# Allegro board stm32f10x.brd
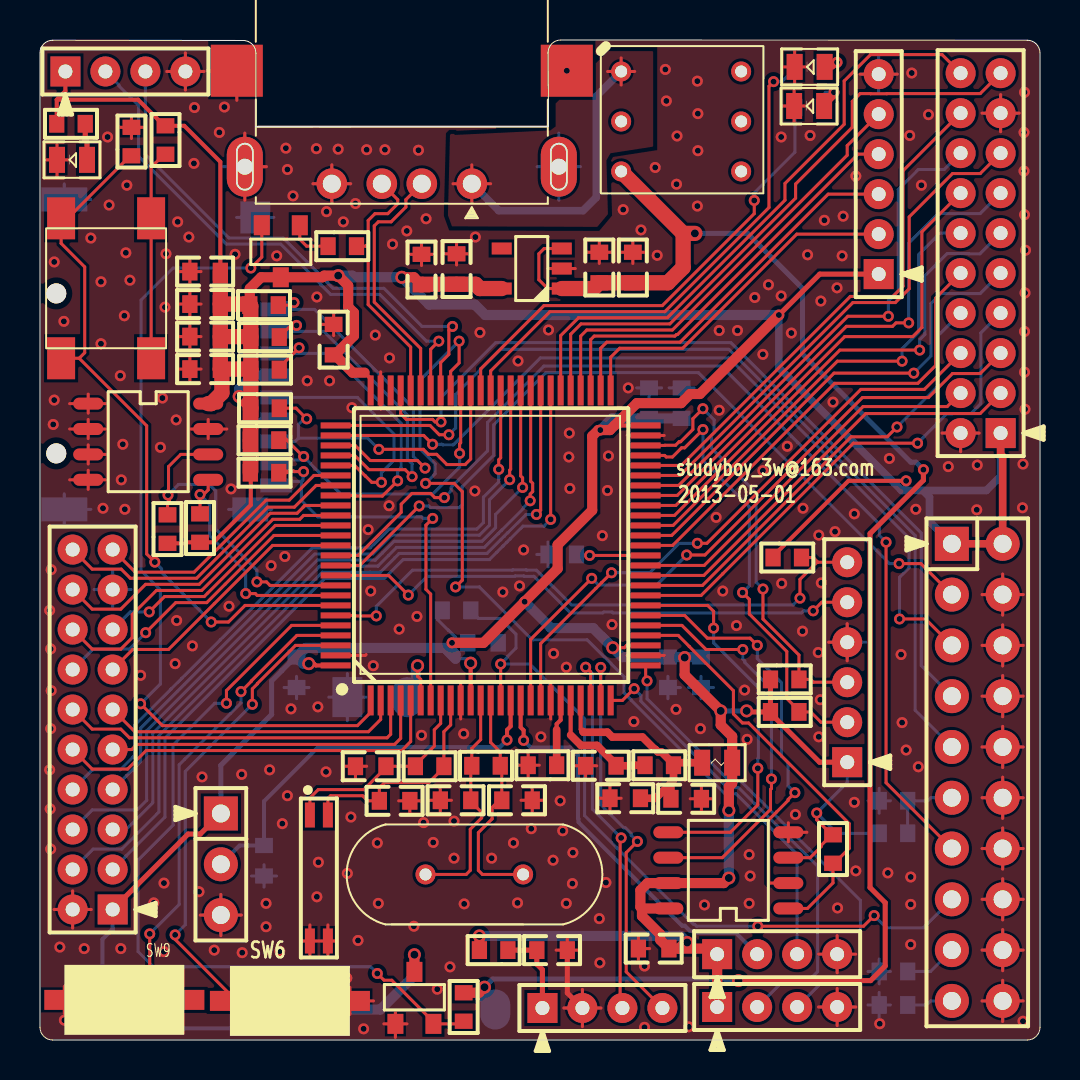
[diagram p0: board, top side]
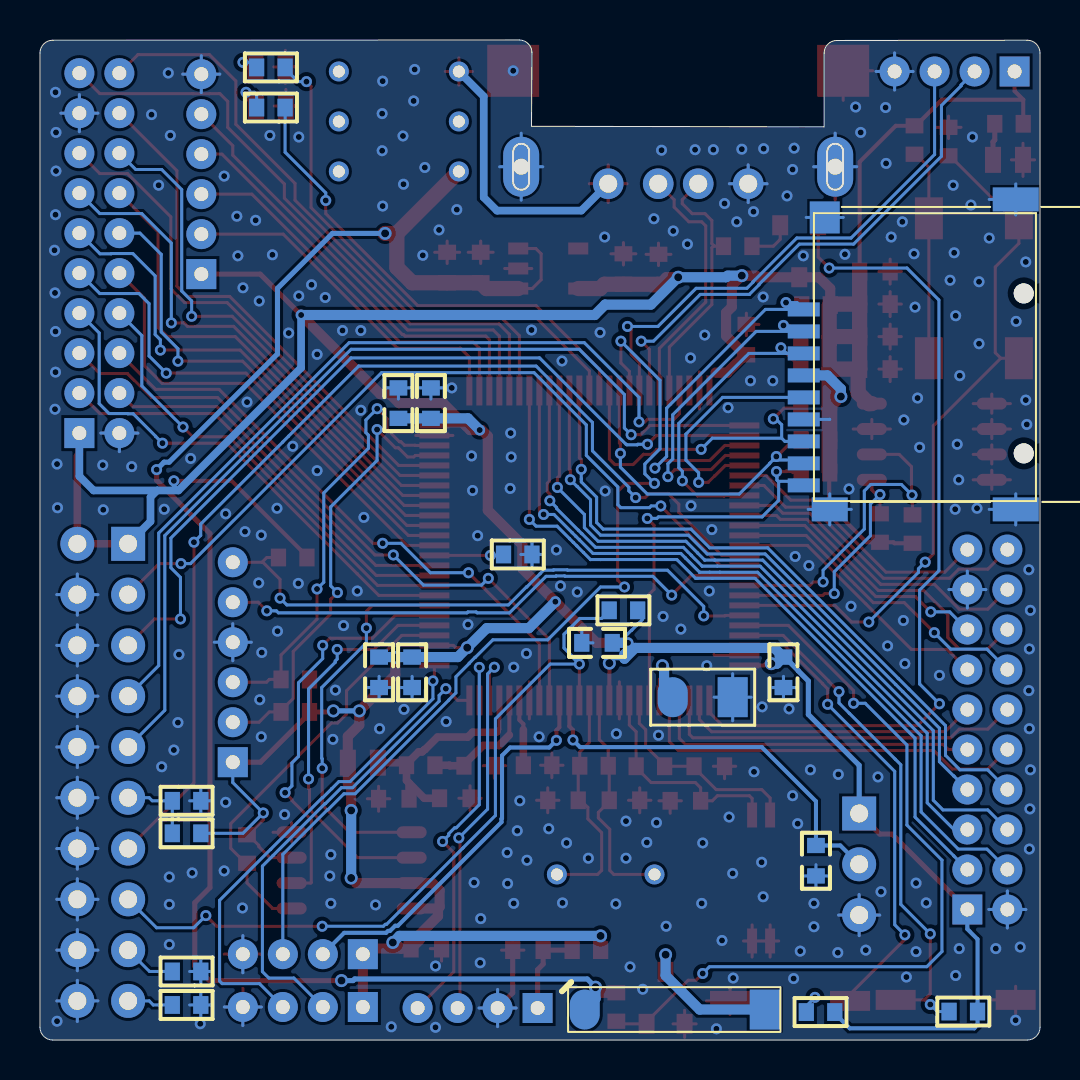
[diagram p1: board, bottom side, seen from below]

Outline 50 x 50.01 mm; copper layers: TOP, BOTTOM. Coordinates in mm from the lower left corner of the outline.
Outline path: 0,49.37 0,0.64 arc(0.19,0.19) 0.64,0 49.37,0 arc(49.81,0.19) 50,0.64 50,49.37 arc(49.81,49.81) 49.37,50 26.04,50.01 arc(25.59,49.83) 25.4,49.37 25.43,45.69 10.79,45.67 10.79,49.35 arc(10.61,49.8) 10.16,49.99 0.64,50 arc(0.19,49.81) 0,49.37

## Placement (name value [footprint] x y rotation side)
BAT2  BATJack/NC  [CON2A]  16.87 17.14 180 bottom
C6  20pF  [C0603]  20.78 11.99 0 top
C8  10uF  [C0603]  29.64 38.63 90 top
C9  20pF  [C0603]  23.85 11.99 180 top
C11  100nF  [C0603]  22.15 19.86 180 bottom
C12  100nF  [C0603]  12.83 18.39 90 bottom
C13  100nF  [C0603]  31.39 18.39 90 bottom
C14  100nF  [C0603]  32.08 31.85 270 bottom
C15  100nF  [C0603]  14.68 35.03 270 top
C16  10uF  [C0603]  32.31 12.06 0 top
C17  10nF  [C0603]  29.26 12.09 0 top
C18  10nF  [C0603]  28.04 13.72 0 top
C19  10uF  [C0603]  20.83 38.56 90 top
C24  100nF  [C0603]  33.05 18.39 90 bottom
C25  100nF  [C0603]  30.45 31.85 270 bottom
C31  1uF  [C0603]  27.97 38.63 90 top
C32  1uF  [C0603]  19.08 38.53 90 top
C48  100nF  [C0603]  8.26 38.43 0 top
C49  100nF  [C0603]  8.26 36.8 0 top
C50  100nF  [C0603]  8.26 35.18 0 top
C65  18pF/1%  [C0603]  16.54 13.69 0 top
C67  18pF/1%  [C0603]  17.73 11.96 180 top
C190  100nF  [C0603]  8.26 33.55 0 top
C191  100nF  [C0603]  30.68 4.57 0 top
C192  100nF  [C0603]  25.6 4.5 180 top
C193  100nF  [C0603]  11.2 8.97 90 bottom
CON105  T_FLASH_A  [TFLASH]  0.81 37.34 270 bottom
D2  RED  [D0805]  1.6 44.02 180 top
D3  RED  [D0805]  38.48 48.67 180 top
D4  RED  [D0805]  38.46 46.71 180 top
DOWN4  -  [USBH]  21.59 42.82 180 top
J9  CON4  [HDR200M-1X4]  1.27 48.44 0 top
J10  CON20A  [HDR254M-2X10]  45.59 24.82 270 top
J12  Power  [SW_2_8X8]  29.06 48.44 90 top
J13  CON20A  [HDR200M-2X10]  48.03 30.35 90 top
J14  CON20A  [HDR200M-2X10]  3.63 6.53 90 top
JP6  CON\1X6P2MM  [HDR200M-1X6]  40.36 13.89 90 top
JP7  CON\1X6P2MM  [HDR200M-1X6]  41.94 38.3 90 top
JP10  CON\1X4P2MM  [HDR200M-1X4]  33.86 1.65 0 top
JP11  CON\1X4P2MM  [HDR200M-1X4]  33.86 4.29 0 top
JP12  CON\1X4P2MM  [HDR200M-1X4]  25.12 1.6 0 top
L2  CBG201209U12  [L0805]  33.86 13.87 180 top
Q3  PNP  [SOT-23]  12.04 39.45 180 top
Q4  PNP  [SOT-23]  18.72 2.11 0 top
R4  10K  [R0603]  26.11 24.28 180 bottom
R5  10K  [R0603]  20.83 21.49 0 bottom
R7  1M/NC  [R0603]  22.3 13.72 0 top
R8  0R  [R0603]  25.12 13.74 180 top
R9  1K  [R0603]  1.55 45.82 0 top
R10  1K  [R0603]  15.11 39.7 0 top
R12  100K  [R0603]  4.57 44.93 90 top
R13  1K  [R0603]  6.27 45.01 270 top
R14  4.7K  [R0603]  37.24 16.41 0 top
R15  4.7K  [R0603]  37.24 18.03 0 top
R16  47R  [R0603]  30.96 13.74 0 top
R17  4.7K  [R0603]  37.36 24.13 0 top
R18  600  [R0603]  38.46 48.64 0 bottom
R19  600  [R0603]  38.46 46.63 0 bottom
R20  33R  [R0603]  22.68 4.5 180 top
R21  4.7K  [R0603]  6.38 25.55 90 top
R22  4.7K  [R0603]  8 25.6 90 top
R23  4.7K  [R0603]  39.65 9.55 270 top
R24  10K  [R0603]  10.97 1.4 0 bottom
R25  10K  [R0603]  3.84 1.42 0 bottom
R26  10K  [R0603]  21.18 1.65 270 top
R27  10K  [HDR254M-1X3]  9.04 11.33 270 top
R28  10K  [R0603]  42.67 11.96 180 bottom
R29  10K  [R0603]  42.67 1.75 0 bottom
R30  10K  [R0603]  42.67 3.43 0 bottom
R31  1K  [R0603]  42.67 10.34 180 bottom
R37  10M  [R0603]  19.48 13.69 0 top
R47  47K  [R0603]  11.25 33.53 0 top
R48  47K  [R0603]  11.23 28.37 0 top
R49  47K  [R0603]  11.25 31.6 0 top
R50  47K  [R0603]  11.23 30 0 top
R51  47K  [R0603]  11.2 36.75 0 top
R52  47K  [R0603]  11.25 35.15 0 top
SW6  Key1  [TACKSW_SS204]  12.5 1.96 180 top
SW8  BOOT  [K6X6_SMD]  0.3 34.59 90 top
SW9  Key2  [TACKSW_SS204]  4.22 2.01 0 top
U1  STM32F103VBH6  [LQFP100_STM32103VBH6]  14.78 30.73 0 top
U5  LDO3V3  [SOT23-5]  24.59 38.58 0 top
U6  W25X20A  [SO-8]  34.42 8.48 90 top
U15  MOT/NC  [SPKER_SMD]  18.26 1.52 180 bottom
U27  AT24C16B  [SO-8]  5.41 29.92 270 top
X3  -  [32768]  13.94 8.1 0 top
Y1  8MHz (With socket)  [49SS]  24.16 8.28 180 top

## Library data of the parts
BAT2 = BATJack_0
C6 C9 C11-C15 C17 C18 C24 C25 = CAP NP
C8 C19 = CP: room: Power
C16 = CAP POL
C31 C32 = CAPACITOR_1
C48-C50 = CAP_Cer_0
C65 C67 = CAPACITOR_0
C190-C193 = CAP_1
CON105 = T_FLASH_A
D2-D4 = LED
DOWN4 = USBA-A_1
J9 = CON4: User Part Number: partnum; Tolerance: RichardLC
J10 J13 J14 = CON20A: User Part Number: partnum; Tolerance: RichardLC
J12 = SW_2
JP6 JP7 = HEADER 5_10: User Part Number: partnum; Tolerance: RichardLC
JP10-JP12 = HEADER 5_3: User Part Number: partnum; Tolerance: RichardLC
L2 = BEAD
Q3 Q4 = NPN_0
R4 R5 R7 R8 R12-R17 R21-R23 R28-R31 R37 R47-R52 = R
R9 R10 = R: room: Power
R18-R20 = R: room: LEDs
R24-R26 = R: room: KEYs
R27 = R_0: User Part Number: partnum; Tolerance: RichardLC; room: KEYs
SW6 SW9 = SW_TACT_SPST/SM
SW8 = SW PUSHBUTTON-SPST-2/SM_1: room: KEYs
U1 = STM32F103VBH6
U5 = RT9293B_0
U6 = EEPROM_2
U15 = MOT
U27 = AT24C16B
X3 = CRYSTAL_XCOL-3_1
Y1 = ZTA

## Footprints (pads in the part's own frame, mm; a bottom-side part is the same pattern mirrored in y, then rotated)
49SS
  round 1 hole 0.6: 1(0,0) 2(4.88,0)
32768
  rect 0.5x1.25 smd: 1(-0.45,3.15) 2(0.45,3.15) 3(-0.45,-3.15) 4(0.45,-3.15)
C0603
  rect 0.762x0.889 smd: 1(-0.762,0) 2(0.762,0)
CON2A
  oval 1.5x2 smd: 1(-1.499,0)
  rect 1.5x2 smd: 2(1.499,0)
D0805
  rect 0.8x1.3 smd: 1(-0.75,0) 2(0.75,0)
HDR200M-1X4
  rect 1.5x1.5 hole 0.7: 1(0,0)
  round 1.5 hole 0.7: 2(2,0) 3(4,0) 4(6,0)
HDR200M-1X6
  rect 1.5x1.5 hole 0.7: 1(0,0)
  round 1.5 hole 0.7: 2(2,0) 3(4,0) 4(6,0) 5(8,0) 6(10,0)
HDR200M-2X10
  rect 1.5x1.5 hole 0.7: 1(0,0)
  round 1.5 hole 0.7: 2(0,2) 3(2,0) 4(2,2) 5(4,0) 6(4,2) 7(6,0) 8(6,2) 9(8,0) 10(8,2) 11(10,0) 12(10,2) 13(12,0) 14(12,2) 15(14,0) 16(14,2) 17(16,0) 18(16,2) 19(18,0) 20(18,2)
HDR254M-1X3
  rect 1.7x1.7 hole 0.9: 1(0,0)
  round 1.7 hole 0.9: 2(2.54,0) 3(5.08,0)
HDR254M-2X10
  rect 1.7x1.7 hole 0.9: 1(0,0)
  round 1.7 hole 0.9: 2(0,2.54) 3(2.54,0) 4(2.54,2.54) 5(5.08,0) 6(5.08,2.54) 7(7.62,0) 8(7.62,2.54) 9(10.16,0) 10(10.16,2.54) 11(12.7,0) 12(12.7,2.54) 13(15.24,0) 14(15.24,2.54) 15(17.78,0) 16(17.78,2.54) 17(20.32,0) 18(20.32,2.54) 19(22.86,0) 20(22.86,2.54)
K6X6_SMD
  rect 2.1x1.4 smd: 1(-0.5,-0.75) 2(6.5,-0.75) 3(-0.5,-5.25) 4(6.5,-5.25)
L0805
  rect 0.8x1.3 smd: 1(-0.75,0) 2(0.75,0)
LQFP100_STM32103VBH6
  rect 0.3x1.5 smd: 1(1.75,-13.75) 2(2.25,-13.75) 3(2.75,-13.75) 4(3.25,-13.75) 5(3.75,-13.75) 6(4.25,-13.75) 7(4.75,-13.75) 8(5.25,-13.75) 9(5.75,-13.75) 10(6.25,-13.75) 11(6.75,-13.75) 12(7.25,-13.75) 13(7.75,-13.75) 14(8.25,-13.75) 15(8.75,-13.75) 16(9.25,-13.75) 17(9.75,-13.75) 18(10.25,-13.75) 19(10.75,-13.75) 20(11.25,-13.75) 21(11.75,-13.75) 22(12.25,-13.75) 23(12.75,-13.75) 24(13.25,-13.75) 25(13.75,-13.75) 51(13.75,1.75) 52(13.25,1.75) 53(12.75,1.75) 54(12.25,1.75) 55(11.75,1.75) 56(11.25,1.75) 57(10.75,1.75) 58(10.25,1.75) 59(9.75,1.75) 60(9.25,1.75) 61(8.75,1.75) 62(8.25,1.75) 63(7.75,1.75) 64(7.25,1.75) 65(6.75,1.75) 66(6.25,1.75) 67(5.75,1.75) 68(5.25,1.75) 69(4.75,1.75) 70(4.25,1.75) 71(3.75,1.75) 72(3.25,1.75) 73(2.75,1.75) 74(2.25,1.75) 75(1.75,1.75)
  rect 1.5x0.3 smd: 26(15.5,-12) 27(15.5,-11.5) 28(15.5,-11) 29(15.5,-10.5) 30(15.5,-10) 31(15.5,-9.5) 32(15.5,-9) 33(15.5,-8.5) 34(15.5,-8) 35(15.5,-7.5) 36(15.5,-7) 37(15.5,-6.5) 38(15.5,-6) 39(15.5,-5.5) 40(15.5,-5) 41(15.5,-4.5) 42(15.5,-4) 43(15.5,-3.5) 44(15.5,-3) 45(15.5,-2.5) 46(15.5,-2) 47(15.5,-1.5) 48(15.5,-1) 49(15.5,-0.5) 50(15.5,0) 76(0,0) 77(0,-0.5) 78(0,-1) 79(0,-1.5) 80(0,-2) 81(0,-2.5) 82(0,-3) 83(0,-3.5) 84(0,-4) 85(0,-4.5) 86(0,-5) 87(0,-5.5) 88(0,-6) 89(0,-6.5) 90(0,-7) 91(0,-7.5) 92(0,-8) 93(0,-8.5) 94(0,-9) 95(0,-9.5) 96(0,-10) 97(0,-10.5) 98(0,-11) 99(0,-11.5) 100(0,-12)
R0603
  rect 0.762x0.889 smd: 1(-0.712,0) 2(0.712,0)
SO-8
  oval 0.599x1.501 smd: 1(-1.905,-3) 2(-0.635,-3) 3(0.635,-3) 4(1.905,-3) 5(1.905,3) 6(0.635,3) 7(-0.635,3) 8(-1.905,3)
SOT23-5
  rect 1.001x0.599 smd: 1(1.501,-1.001) 2(1.501,0) 3(1.501,1.001) 4(-1.501,1.001) 5(-1.501,-1.001)
SOT-23
  rect 0.8x1 smd: 1(-0.95,-1.3) 2(0.95,-1.3) 3(0,1.3)
SPKER_SMD
  oval 1.5x2 smd: 1(-4.5,0)
  rect 1.5x2 smd: 2(4.5,0)
SW_2_8X8
  round 1 hole 0.6: 1(0,0) 2(-2.5,0) 3(-5,0) 4(0,-6) 5(-2.5,-6) 6(-5,-6)
TACKSW_SS204
  rect 2x1 smd: 1(-3,0) 2(3,0)
TFLASH
  round 1 hole 1 unplated: (0,0) (8,0)
  rect 0.7x1.6 smd: 1(0.8,-11) 2(1.9,-11) 3(3,-11) 4(4.1,-11) 5(5.2,-11) 6(6.3,-11) 7(7.4,-11) 8(8.5,-11) 9(9.6,-11)
  rect 1.6x1.5 smd: 10(-3.8,-9.95)
  rect 1.2x2.3 smd: 11(-4.7,-0.4) 13(10.8,-0.4)
  rect 1.2x1.8 smd: 12(10.8,-9.7)
USBH
  round 1.53 hole 0.9: 1(0,0) 2(2.5,0) 3(4.5,0) 4(7,0)
  oval 1.8x3 hole 0.8: 5(11.35,-0.85) 6(-4.35,-0.85)
  rect 2.6x2.6 smd: 7(11.75,-5.65) 8(-4.75,-5.65)

## Nets
+3V3: C11.2 C12.2 C13.2 C14.2 C15.2 C19.1 C24.2 C25.2 C32.1 C48.2 C49.2 C50.2 C190.2 C191.2 CON105.4(VDD) J9.1 J10.1 J10.2 J13.1 J14.1 JP6.1 JP7.1 JP10.1 JP11.1 L2.1 Q3.3(E) R5.1 R9.1 R13.1 R14.1 R15.1 R17.1 R20.2 R21.1 R22.1 R23.1 R24.1 R25.1 R27.1 R31.2 R47.1 R48.1 R49.1 R50.1 R51.1 R52.1 U1.11(VDD_5) U1.28(VDD_4) U1.50(VDD_1) U1.75(VDD_2) U1.100(VDD_3) U5.5(VOUT) U6.3(WP#) U6.7(HOLD#) U6.8(VCC) U27.8(VCC)
+5V: C8.1 C31.1 J12.3 R26.1 U5.1(VIN) U5.3(CE) U15.1(P)
GND: BAT2.2(-) C6.1 C8.2 C9.1 C11.1 C12.1 C13.1 C14.1 C15.1 C16.2 C17.1 C18.1 C19.2 C24.1 C25.1 C31.2 C32.2 C48.1 C49.1 C50.1 C65.1 C67.1 C190.1 C191.1 C192.1 C193.1 CON105.6(GND) CON105.10 CON105.11 CON105.12 CON105.13 D2.2(CATHODE) D3.2(CATHODE) D4.2(CATHODE) DOWN4.4(GND) DOWN4.5(HAND1) DOWN4.6(HAND2) DOWN4.7(HAND3) DOWN4.8(HAND4) J9.4 J10.4 J10.6 J10.8 J10.10 J10.12 J10.14 J10.16 J10.18 J10.20 J13.2 J13.17 J14.2 J14.17 JP6.4 JP7.6 JP10.4 JP11.4 JP12.2 Q4.1(C) R4.2 R8.2 R12.2 R27.3 R28.2 R29.1 R30.1 SW6.1 SW9.1 U1.10(VSS_5) U1.19(VSSA) U1.27(VSS_4) U1.49(VSS_1) U1.74(VSS_2) U1.99(VSS_3) U5.2(GND) U6.4(GND) U27.1(A0) U27.2(A1) U27.3(A2) U27.4(NGND) U27.7(WP) X3.3(SHIELD) X3.4
VBAT: BAT2.1(+) U1.6(VBAT)
VDDA: C16.1 C17.2 L2.2 R16.2 U1.22(VDDA)
ADC0: C193.2 R27.2 U1.15(PC0/ADC_INI0)
ADC1: JP11.2 U1.16(PC1/ADC_INI1)
ADC1_EN: JP11.3 U1.67(PA8/USART1_CK/TIM1_CH1/MCO)
BOOT0: R12.1 SW8.1 SW8.2 U1.94(BOOT0)
CLK32K-IN: C65.2 R37.1 U1.8(PC14-OSC32_IN) X3.1
CLK32K-OUT: C67.2 R37.2 U1.9(PC15-OSC32_OUT) X3.2
DBGACK: J10.19 R29.2
DBGRQ: J10.17 R30.2
I2C1_INT: JP6.6 R17.2 U1.95(PB8/TIM4_CH3)
I2C1_SCL: R21.2 U1.92(PB6/I2C1_SCL/TIM4_CH1) U27.6(SCL)
I2C1_SDA: R22.2 U1.93(PB7/I2C1_SDA/TIM4_CH2) U27.5(SDA)
I2C1_SMBAL: JP6.5 U1.91(PB5/I2C1_SMBAL)
I2C2_SCL: JP6.2 R14.2 U1.47(PB10/I2C2_SCL/USART3_TX)
I2C2_SDA: JP6.3 R15.2 U1.48(PB11/I2C2_SDA /USART3_RX)
IRDA_RX: JP12.3 U1.23(PA0-WKUP/USART2_CTS/A DC_IN0/TI)
IRDA_TX: JP12.4 U1.24(PA1/USART2_RTS/ADC_IN1/TIM2_CH2)
KEY1: R24.2 SW6.2 U1.98(PE1)
KEY2: R25.2 SW9.2 U1.97(PE0/TIM4_ETR)
LED1: R18.1 U1.63(PC6)
LED2: R19.1 U1.64(PC7)
MOT: Q4.2(B) R26.2 U1.96(PB9/TIM4_CH4)
OSC_IN: C6.2 R7.1 U1.12(OSC_IN) Y1.2
OSC_OUT: C9.2 R7.2 U1.13(OSC_OUT) Y1.1
PB0: J13.3 U1.35(PB0/ADC_IN8/TIM3_CH3)
PB1: J13.4 U1.36(PB1/ADC_IN9/TIM3_CH4)
PB2: R4.1 U1.37(PB2/BOOT1)
PC2: J13.5 U1.17(PC2/ADC_INI2)
PC3: J13.6 U1.18(PC3/ADC_INI3)
PC4: J13.7 U1.33(PC4/ADC_INI4)
PC5: J13.8 U1.34(PC5/ADC_INI5)
PD0: J14.19 U1.81(PD0)
PD1: J14.20 U1.82(PD1)
PD3: J14.18 U1.84(PD3)
PD4: J14.16 U1.85(PD4)
PD5: J14.15 U1.86(PD5)
PD6: J14.14 U1.87(PD6)
PD7: J14.13 U1.88(PD7)
PD8: J13.19 U1.55(PD8)
PD9: J13.20 U1.56(PD9)
PD10: J14.3 U1.57(PD10)
PD11: J14.4 U1.58(PD11)
PD12: J14.5 U1.59(PD12)
PD13: J14.6 U1.60(PD13)
PD14: J14.7 U1.61(PD14)
PD15: J14.8 U1.62(PD15)
PE3: J14.11 U1.2(PE3)
PE4: J14.12 U1.3(PE4)
PE5: J14.9 U1.4(PE5)
PE6: J14.10 U1.5(PE6)
PE7: J13.10 U1.38(PE7)
PE8: J13.9 U1.39(PE8)
PE9: J13.12 U1.40(PE9)
PE10: J13.11 U1.41(PE10)
PE11: J13.14 U1.42(PE11)
PE12: J13.13 U1.43(PE12)
PE13: J13.16 U1.44(PE13)
PE14: J13.15 U1.45(PE14)
PE15: J13.18 U1.46(PE15)
RESET#: J10.15 R5.2 U1.14(NRST)
RTCK: J10.11 R28.1 R31.1
SPI1_MISO: U1.31(PA6/SPI1_MISO/ADC_IN6/TIM3_CH1) U6.2(SO)
SPI1_MOSI: U1.32(PA7/SPI1_MOSI/ADC_IN7/TIM3_CH2) U6.5(SI)
SPI1_NSS: R23.2 U1.29(PA4/SPI1_NSS/U SART2_CK/ADC_IN4) U6.1(CS#)
SPI1_SCK: U1.30(PA5/SPI1_SCK/ADC_IN5) U6.6(SCK)
SPI2_MISO: JP7.4 U1.53(PB14/SPI2_MISO/USART3_RTS/TIM1_)
SPI2_MOSI: JP7.5 U1.54(PB15/SPI2_MOSITIM1_CH3N)
SPI2_NSS: JP7.2 U1.51(PB12/SPI2_NSS /I2C2_SMBAL/USART)
SPI2_SCK: JP7.3 U1.52(PB13/SPI2_SCK/USART3_CTS/TIM1_C)
TCK/SWCLK: J10.9 U1.76(PA14/JTCK-SWCLK)
TDI: J10.5 U1.77(PA15/JTDI)
TDO/SWO: J10.13 U1.89(PB3/JTDO)
TF0_CD: CON105.9(DET) R48.2 U1.7(PC13-ANTI_TAMP)
TF0_CLK: CON105.5(CLK) U1.80(PC12)
TF0_CMD: CON105.3(CMD) R47.2 U1.83(PD2/TIM3_ETR)
TF0_D0: CON105.7(D0) R49.2 U1.65(PC8)
TF0_D1: CON105.8(D1) R50.2 U1.66(PC9)
TF0_D2: CON105.1(D2) R51.2 U1.78(PC10)
TF0_D3: CON105.2(D3) R52.2 U1.79(PC11)
TMS/SWDIO: J10.7 U1.72(PA13/JTMS-SWDAT)
TRST: J10.3 U1.90(PB4/JTRST)
USART0_RX: J9.2 U1.69(PA10/USART1_RX/T IM1_CH3)
USART0_TX: J9.3 U1.68(PA9/USART1_TX/T IM1_CH2)
USART2_RX: JP10.3 U1.26(PA3/USART2_RX/ADC_IN3/TIM2_CH4)
USART2_TX: JP10.2 U1.25(PA2/USART2_TX/ADC_IN2/TIM2_CH3)
USB_DM: DOWN4.2(D-) U1.70(PA11/USART1_CTS/CANRX/USBDM(2)/)
USB_DP: DOWN4.3(D+) R10.2 U1.71(PA12/USART1_RTS/CANTX/USBDP(2)/)
USB_M: Q3.2(B) U1.1(PE2)
USBVBUS: DOWN4.1(VCC) J12.1
VREF: C18.2 R16.1 U1.21(VREF+)
VREF-: R8.1 U1.20(VREF-)
N287128: D2.1(ANODE) R9.2
N15834662: Q3.1(C) R10.1
N15844638: D3.1(ANODE) R18.2
N15844642: D4.1(ANODE) R19.2
N15845249: Q4.3(E) U15.2(N)
N15864601: C192.2 JP12.1 R20.1
N15869244: R13.2 SW8.3 SW8.4

Pads without a net: J12 2 4 5 6; U1 73; U5 4

## Via types
v1: diameter 0.55, hole 0.3, TOP to BOTTOM, 338 vias
v2: diameter 0.65, hole 0.4, TOP to BOTTOM, 18 vias

## Routing (per net, layer and track width the routed paths; a pad name or vN(x,y) marks a point on that pad's centre or on a via; arc(x,y) is an arc through that point)
+3V3: length 290
  TOP w0.152: U6.3 38.51,9.12 39.06,9.67 39.06,9.74 39.59,10.26 ; v2(28.64,19.62) 29.22,19.62 29.33,19.73 U1.28 ; v1(38.84,11.35) 38.84,11.01 39.59,10.26 ; 39.59,10.26 R23.1
  TOP w0.203: v2(13.44,18.82) 13.7,18.82 13.79,18.73 U1.100 ; U1.11 v2(21.53,18.85) ; 0.84,47.03 1.27,47.46 J9.1 ; 0.84,47.03 R9.1 ; 0.84,47.03 4.9,47.03 6.21,45.72 R13.1 7.21,45.72 9.02,43.92 9.02,38.43 ; R21.1 7.28,24.84 7.33,24.89 R22.1 8.67,24.89 10.54,26.76 10.54,28.45 ; R17.1 36.65,24.19 40.42,27.97 v1(43.31,27.97) ; U1.75 16.53,33.07 16.23,33.38 ; 28.73,30.73 U1.50
  TOP w0.254: R27.1 8.01,10.3 7.4,10.3 J14.1 ; JP7.1 38.99,38.3 v1(36.94,36.26) ; R14.1 36.52,16.34 38.98,13.89 JP6.1 ; R14.1 R15.1 ; R14.1 35.38,16.41 v2(35.33,16.46)
  TOP w0.381: J10.1 J10.2 48.13,29.18 48.03,29.29 J13.1
  TOP w0.508: v2(34.44,11.48) 34.44,12.67 34.61,12.84 L2.1 34.61,15.18 34.04,15.75 v2(34.04,16.46) 32.23,18.26 v2(32.23,19.13) ; v1(20.6,19.86) 22.17,19.86 v1(24.23,21.92) 25.88,23.57 25.88,24.77 27.61,26.49 27.61,30.2 27.91,30.51 v1(28.02,30.51) 28.5,30.51 29.84,31.85 32.05,31.85 32.51,32.31 32.99,32.31 v1(36.94,36.26) ; 31.95,4.57 33.58,4.57 JP11.1 JP10.1 ; 31.95,4.57 32.26,4.88 v2(32.36,4.88) ; 31.95,4.57 C191.2 31.01,5 31.01,5.28 30.1,6.2 30.1,6.58 ; 10.57,30.07 10.57,31.57 v2(9.96,32.18) R49.1 ; R20.2 v2(21.97,5.21) ; 16.23,33.38 15.63,33.38 14.74,34.26 ; R51.1 10.49,37.58 11.06,38.15 Q3.3 14.12,38.15 14.2,38.23 v2(14.91,38.23) 15.41,37.73 15.41,36.66 15.7,36.37 15.7,35.22 14.74,34.26 ; U6.8 30.1,6.58 ; 30.1,6.58 30.02,6.66 30.02,7.49 30.38,7.85 U6.7 34.19,7.85 v2(34.44,8.1) ; 14.74,34.26 C15.2 ; v2(18.09,38.15) 18.7,38.15 C32.1
  TOP w0.762: 9.02,36.8 9.02,35.18 ; 9.02,36.8 10.44,36.8 R51.1 10.54,36.7 R52.1 ; 9.02,36.8 9.02,38.43 ; 9.02,35.18 10.51,35.18 R52.1 ; 9.02,35.18 9.02,33.55 ; R49.1 10.54,28.45 ; R49.1 R47.1 ; R49.1 10.51,31.57 R50.1 R48.1 ; U5.5 21.99,37.58 21.78,37.8 C19.1 19.1,37.8 C32.1 ; 9.02,33.55 10.51,33.55 R47.1 ; 9.02,33.55 9.09,33.48 9.09,32.36 8.56,31.83 U27.8 ; R52.1 R47.1
  BOTTOM w0.152: R5.1 20.12,21.31 19.89,21.08 19.89,21.02 20.41,20.49 20.43,20.49 20.78,20.14 20.78,19.29 ; 20.78,19.07 21.31,19.07 v2(21.53,18.85) ; R31.2 39.85,10.34 v1(38.84,11.35) 40.36,12.88 JP6.1
  BOTTOM w0.203: J14.1 3.63,5.55 3.12,5.04 R25.1 3.12,0.75 3.29,0.58 9.51,0.58 10.26,1.33 R24.1 ; v1(43.31,27.97) 43.31,27.71 43.08,27.48
  BOTTOM w0.254: R27.1 9.04,13.74 11.58,16.28 11.58,17.96 12.09,18.47 12.09,18.48 12.76,19.15 C12.2 ; v2(34.04,16.46) v2(35.33,16.46)
  BOTTOM w0.381: 44.15,27.48 47.32,27.48 48.03,28.19 J13.1 ; 44.15,27.48 43.08,27.48 36.94,33.62 v1(36.94,36.26) ; 44.15,27.48 44.48,27.15 44.48,25.93 J10.1 ; C24.2 33.02,19.13 v2(32.23,19.13)
  BOTTOM w0.508: C24.2 C13.2 29.11,19.15 v2(28.64,19.62) 27.66,20.6 25.55,20.6 v1(24.23,21.92) ; v2(9.96,32.18) 9.96,32.56 10.63,33.24 CON105.4 ; v2(32.36,4.88) 32.03,5.21 v2(21.97,5.21) ; C14.2 C25.2 28.6,31.09 v1(28.02,30.51) ; v2(34.44,8.1) v2(34.44,11.48) ; C11.2 v1(20.6,19.86) 20.6,19.46 20.78,19.29 20.78,19.07 20.24,19.61 13.28,19.61 C12.2 13.16,18.82 v2(13.44,18.82) ; v2(14.91,38.23) 15.62,38.23 15.7,38.15 v2(18.09,38.15) 19.46,36.78 21.74,36.78 22.26,36.26 v1(36.94,36.26)
+5V: length 84.6
  TOP w0.152: U5.3 25.21,39.58 24.94,39.32 24.94,38.02 25.38,37.58 U5.1
  TOP w0.254: v1(44.17,28.52) 44.17,28 41.5,25.33 41.5,7.62 42.26,6.86 42.26,3.7 41.53,2.97 v2(34.92,2.97)
  TOP w0.508: R26.1 21.95,2.36 v2(22.23,2.64)
  TOP w0.762: 32.16,40.34 32.16,38.63 31.39,37.87 C8.1 C31.1 27.68,37.58 U5.1 ; 32.16,40.34 v2(32.74,40.34) ; 32.16,40.34 J12.3
  BOTTOM w0.254: v2(22.23,2.64) 22.63,3.05 34.27,3.05 34.35,2.97 v2(34.92,2.97) ; v2(32.74,40.34) 35.38,40.34 38.13,37.59 38.13,34.32 43.54,28.9 43.8,28.9 v1(44.17,28.52)
  BOTTOM w0.508: U15.1 22.23,2.06 v2(22.23,2.64)
GND: length 305.6
  TOP w0.152: C31.2 28.59,39.4 ; C31.2 27.97,38.84 ; C31.2 27.97,39.95 ; C31.2 27.34,39.4 ; 7.27,47.51 J9.4 ; J9.4 8.2,48.44 ; J9.4 7.27,49.37 ; J9.4 6.34,48.44 ; 8.01,6.25 R27.3 ; R27.3 9.04,7.28 ; R27.3 10.07,6.25 ; R27.3 9.04,5.22 ; J10.12 48.13,13.14 ; J10.12 48.13,11.09 ; J10.12 49.16,12.12 ; J10.12 47.11,12.12 ; C191.1 30.48,4.57 ; C191.1 29.92,5.19 ; C191.1 29.92,3.95 ; 29.35,30.23 U1.49 31.21,30.23 ; J13.2 46.96,30.35 ; J13.2 45.1,30.35 ; J13.2 46.03,29.43 ; 20.02,11.37 C6.1 ; C6.1 20.57,11.99 ; C6.1 19.46,11.99 ; C6.1 20.02,12.61 ; C192.1 26.37,5.12 ; C192.1 25.81,4.5 ; C192.1 26.92,4.5 ; SW9.1 1.22,2.68 ; SW9.1 2.39,2.01 ; SW9.1 1.22,1.33 ; 27.28,13.09 C18.1 ; C18.1 26.72,13.72 ; C18.1 27.84,13.72 ; 14.39,4.15 X3.4 ; X3.4 13.97,4.95 ; X3.4 14.82,4.95 ; X3.4 14.39,5.76 ; J10.14 48.13,10.6 ; J10.14 47.11,9.58 ; J10.14 48.13,8.55 ; J10.14 49.16,9.58 ; 13.07,4.95 X3.3 ; X3.3 13.92,4.95 ; X3.3 13.49,5.76 ; X3.3 13.49,4.15 ; 24.41,13.12 R8.2 ; R8.2 23.85,13.74 ; R8.2 24.41,14.36 ; R8.2 24.97,13.74 ; C48.1 8.05,38.43 ; C48.1 6.93,38.43 ; C48.1 7.49,39.05 ; C48.1 7.49,37.81 ; 37.71,45.88 D4.2 ; D4.2 37.13,46.71 ; D4.2 37.71,47.54 ; D4.2 38.28,46.71 ; 1.48,31.83 U27.1 ; U27.1 3.34,31.83 ; U27.1 2.41,32.3 ; U27.1 2.41,31.35 ; 6.93,33.55 C190.1 ; C190.1 7.49,32.93 ; C190.1 7.49,34.18 ; C190.1 8.05,33.55 ; SW6.1 16.67,1.96 ; SW6.1 15.5,2.63 ; SW6.1 14.32,1.96 ; SW6.1 15.5,1.28 ; U1.99 16.26,19.23 16.31,19.28 ; JP11.4 40.79,4.29 ; JP11.4 39.86,3.36 ; JP11.4 38.93,4.29 ; JP11.4 39.86,5.22 ; 47.11,4.5 J10.18 ; J10.18 48.13,3.47 ; J10.18 49.16,4.5 ; J10.18 48.13,5.52 ; JP12.2 28.05,1.6 ; JP12.2 26.19,1.6 ; JP12.2 27.12,0.67 ; JP12.2 27.12,2.53 ; 37.42,9.91 U6.4 ; U6.4 37.42,10.87 ; U6.4 38.35,10.39 ; 9.84,47 DOWN4.7 8.36,48.47 ; 39.86,0.72 JP10.4 ; JP10.4 39.86,2.58 ; JP10.4 38.93,1.65 ; JP10.4 40.79,1.65 ; 15.21,13.69 C65.1 ; C65.1 15.77,13.07 ; C65.1 16.33,13.69 ; 18.49,11.34 C67.1 ; C67.1 19.05,11.96 ; C67.1 17.93,11.96 ; R12.2 5.19,45.64 ; R12.2 3.95,45.64 ; R12.2 4.57,45.09 ; R12.2 4.57,46.2 ; J10.20 48.13,2.98 ; J10.20 47.11,1.96 ; J10.20 48.13,0.93 ; J10.20 49.16,1.96 ; J10.4 48.13,23.3 ; J10.4 49.16,22.28 ; J10.4 48.13,21.25 ; J10.4 47.11,22.28 ; 0.7,6.53 J14.2 ; J14.2 1.63,7.46 ; J14.2 2.56,6.53 ; J14.2 1.63,5.6 ; C17.1 28.5,12.71 ; C17.1 28.5,11.47 ; C17.1 29.06,12.09 ; C17.1 27.94,12.09 ; 17.03,33.41 U1.74 17.03,31.56 ; 17.77,0.13 Q4.1 ; Q4.1 18.35,0.81 ; Q4.1 17.77,1.49 ; Q4.1 17.19,0.81 ; D2.2 1.43,44.02 ; D2.2 0.85,44.85 ; D2.2 0.27,44.02 ; D2.2 0.85,43.19 ; 21.03,16.06 U1.10 21.03,17.91 ; 48.13,6.01 J10.16 ; J10.16 49.16,7.04 ; J10.16 47.11,7.04 ; J10.16 48.13,8.06 ; C50.1 7.49,35.8 ; C50.1 7.49,34.56 ; C50.1 6.93,35.18 ; C50.1 8.05,35.18 ; 6.93,36.8 C49.1 ; C49.1 8.05,36.8 ; C49.1 7.49,37.43 ; C49.1 7.49,36.18 ; U27.4 3.34,28.02 ; U27.4 2.41,27.54 ; U27.4 1.48,28.02 ; U27.4 2.41,28.49 ; C8.2 30.26,39.4 ; C8.2 29.64,38.84 ; C8.2 29.64,39.95 ; C8.2 29.02,39.4 ; 41.01,48.3 JP7.6 42.86,48.3 ; 24.05,11.99 C9.1 ; C9.1 25.17,11.99 ; C9.1 24.61,11.37 ; C9.1 24.61,12.61 ; 1.48,30.56 U27.2 ; U27.2 2.41,31.03 ; U27.2 3.34,30.56 ; U27.2 2.41,30.08 ; J10.6 48.13,20.76 ; J10.6 49.16,19.74 ; J10.6 47.11,19.74 ; J10.6 48.13,18.71 ; 47.1,46.35 J13.17 ; J13.17 48.96,46.35 ; J13.17 48.03,45.43 ; J13.17 48.03,47.28 ; 40.36,18.97 JP6.4 ; JP6.4 40.36,20.82 ; JP6.4 39.43,19.89 ; J10.8 49.16,17.2 ; J10.8 48.13,16.17 ; J10.8 48.13,18.22 ; J10.8 47.11,17.2 ; J10.10 49.16,14.66 ; J10.10 48.13,15.68 ; J10.10 47.11,14.66 ; J10.10 48.13,13.63 ; C16.2 33.63,12.06 ; C16.2 33.07,12.69 ; C16.2 33.07,11.44 ; C16.2 32.51,12.06 ; 29.35,19.23 U1.27 31.21,19.23 ; 8.41,30.08 U27.7 ; U27.7 8.41,31.03 ; U27.7 7.48,30.56 ; U27.7 9.34,30.56 ; D3.2 38.31,48.67 ; D3.2 37.15,48.67 ; D3.2 37.73,49.49 ; D3.2 37.73,47.84 ; C15.1 14.68,36.35 ; C15.1 14.68,35.23 ; C15.1 14.06,35.79 ; 26.77,38.58 U5.2 25.41,38.58 ; DOWN4.4 14.59,43.77 ; DOWN4.4 15.53,42.82 ; DOWN4.4 14.59,41.88 ; DOWN4.4 13.65,42.82 ; 18.45,39.29 C32.2 ; C32.2 19.08,38.73 ; C32.2 19.08,39.85 ; C32.2 19.7,39.29 ; 20.21,39.32 C19.2 ; C19.2 20.83,38.76 ; C19.2 21.45,39.32 ; C19.2 20.83,39.88 ; DOWN4.5 10.24,45.35 ; DOWN4.5 10.24,42 ; DOWN4.5 11.32,43.67 ; U27.3 3.34,29.29 ; U27.3 2.41,29.76 ; U27.3 2.41,28.81 ; 25.53,17.91 U1.19 25.53,16.06
  TOP w0.254: JP12.2 26.37,2.36 C192.1
  BOTTOM w0.152: J10.20 49.16,1.96 ; J10.20 48.13,0.93 ; J10.20 47.11,1.96 ; J10.20 48.13,2.98 ; R4.2 25.4,24.9 ; R4.2 25.96,24.28 ; R4.2 24.84,24.28 ; R4.2 25.4,23.66 ; 41.96,11.34 R28.2 ; R28.2 42.52,11.96 ; R28.2 41.4,11.96 ; R28.2 41.96,12.59 ; R27.3 9.04,7.28 ; R27.3 9.04,5.22 ; R27.3 10.07,6.25 ; R27.3 8.01,6.25 ; 39.86,5.22 JP11.4 39.86,3.36 ; C25.1 31.08,32.61 ; C25.1 30.45,32.05 ; C25.1 29.83,32.61 ; 32.08,32.05 C14.1 ; C14.1 32.7,32.61 ; C14.1 31.46,32.61 ; DOWN4.4 15.53,42.82 ; DOWN4.4 14.59,43.77 ; DOWN4.4 13.65,42.82 ; DOWN4.4 14.59,41.88 ; 47.11,9.58 J10.14 ; J10.14 48.13,10.6 ; J10.14 49.16,9.58 ; J10.14 48.13,8.55 ; 41.96,1.13 R29.1 ; R29.1 42.52,1.75 ; R29.1 41.4,1.75 ; R29.1 41.96,2.37 ; 41.94,47.38 JP7.6 ; JP7.6 41.94,49.23 ; JP7.6 41.01,48.3 ; JP7.6 42.86,48.3 ; 48.13,21.25 J10.4 ; J10.4 47.11,22.28 ; J10.4 48.13,23.3 ; J10.4 49.16,22.28 ; 48.13,13.63 J10.10 ; J10.10 48.13,15.68 ; J10.10 49.16,14.66 ; J10.10 47.11,14.66 ; 15.37,15.97 BAT2.2 ; BAT2.2 15.37,18.32 ; BAT2.2 14.44,17.14 ; BAT2.2 16.29,17.14 ; 47.11,12.12 J10.12 ; J10.12 49.16,12.12 ; J10.12 48.13,13.14 ; J10.12 48.13,11.09 ; 7.27,47.51 J9.4 ; J9.4 7.27,49.37 ; J9.4 6.34,48.44 ; J9.4 8.2,48.44 ; 25.94,42 DOWN4.6 ; DOWN4.6 24.86,43.67 ; DOWN4.6 27.02,43.67 ; DOWN4.6 25.94,45.35 ; 47.1,46.35 J13.17 ; J13.17 48.03,47.28 ; J13.17 48.96,46.35 ; J13.17 48.03,45.43 ; 22.35,19.86 C11.1 22.91,20.49 ; 47.11,7.04 J10.16 ; J10.16 48.13,8.06 ; J10.16 48.13,6.01 ; J10.16 49.16,7.04 ; R30.1 42.52,3.43 ; R30.1 41.96,2.81 ; R30.1 41.96,4.05 ; R30.1 41.4,3.43 ; CON105.11 2.54,42.04 ; CON105.11 1.21,41.26 ; CON105.11 1.21,42.82 ; CON105.6 10.52,31.04 ; 46.03,29.43 J13.2 ; J13.2 46.96,30.35 ; J13.2 45.1,30.35 ; 26.19,1.6 JP12.2 ; JP12.2 27.12,0.67 ; JP12.2 27.12,2.53 ; JP12.2 28.05,1.6 ; DOWN4.5 10.24,45.35 ; DOWN4.5 11.32,43.67 ; DOWN4.5 9.16,43.67 ; 47.11,19.74 J10.6 ; J10.6 49.16,19.74 ; J10.6 48.13,20.76 ; J10.6 48.13,18.71 ; 10.58,8.2 C193.1 ; C193.1 11.2,7.65 ; C193.1 11.2,8.76 ; C193.1 11.82,8.2 ; CON105.12 10.51,27.32 ; CON105.12 11.59,26.54 ; CON105.12 10.51,25.76 ; CON105.12 9.43,26.54 ; JP6.4 40.36,20.82 ; JP6.4 41.29,19.89 ; JP6.4 39.43,19.89 ; JP6.4 40.36,18.97 ; J14.2 1.63,7.46 ; J14.2 2.56,6.53 ; J14.2 0.7,6.53 ; J14.2 1.63,5.6 ; 3.63,21.6 J14.17 ; J14.17 3.63,23.46 ; J14.17 2.7,22.53 ; J14.17 4.56,22.53 ; 47.11,17.2 J10.8 ; J10.8 49.16,17.2 ; J10.8 48.13,18.22 ; J10.8 48.13,16.17 ; 48.13,3.47 J10.18 ; J10.18 48.13,5.52 ; J10.18 49.16,4.5 ; J10.18 47.11,4.5 ; 31.39,17.07 C13.1 ; C13.1 32.02,17.63 ; C13.1 31.39,18.19 ; C24.1 33.67,17.63 ; C24.1 32.42,17.63 ; C24.1 33.05,18.19 ; C24.1 33.05,17.07 ; 12.2,17.63 C12.1 ; C12.1 12.83,18.19 ; C12.1 12.83,17.07 ; C12.1 13.45,17.63 ; JP10.4 40.79,1.65 ; JP10.4 39.86,0.72 ; JP10.4 38.93,1.65 ; 1.21,25.76 CON105.13 ; CON105.13 2.54,26.54 ; CON105.13 1.21,27.32 ; 11.69,41.14 CON105.10 9.83,41.14
  vias: v1(0.48,21.49) v1(0.53,19.56) v1(0.53,15.57) v1(0.48,13.51) v1(0.51,11.56) v1(0.53,9.55) v1(0.56,23.52) v1(0.56,17.48) v1(0.71,38.91) v1(0.71,32) v1(0.66,30.78) v1(0.99,4.65) v1(1.19,35.94) v1(1.22,0.99) v1(2.21,4.57) v1(2.54,40.11) v1(3.05,37.92) v1(3.05,34.82) v1(3.15,26.59) v1(3.38,45.16) v1(3.45,41.76) v1(4.01,33.22) v1(4.04,4.57) v1(4.14,29.79) v1(4.06,28.02) v1(4.22,36.22) v1(4.24,26.54) v1(4.22,3.23) v1(4.34,42.75) v1(4.29,39.37) v1(4.5,38) v1(5.03,18.24) v1(5.69,6.86) v1(6.02,29.64) v1(6.12,32.11) v1(6.25,36.65) v1(6.2,7.85) v1(6.2,4.42) v1(6.3,39.32) v1(6.68,3.15) v1(6.81,31.01) v1(6.83,20.98) v1(6.76,18.82) v1(6.88,40.92) v1(7.44,40.16) v1(7.62,19.71) v1(7.72,46.63) v1(7.7,43.84) v1(7.95,7.42) v1(8.1,13.16) v1(8.71,4.5) v1(8.97,45.39) v1(9.22,46.66) v1(9.45,21.69) v1(9.55,27.56) v1(9.75,39.29) v1(10.08,13.28) v1(10.11,4.37) v1(11.3,6.83) v1(11.3,5.66) v1(11.48,13.51) v1(11.56,23.72) v1(11.84,39.22) v1(11.99,4.45) v1(12.12,10.82) v1(12.24,24.18) v1(12.29,44.6) v1(12.32,3.07) v1(12.37,43.54) v1(12.37,12.22) v1(12.55,16.56) v1(12.65,42.21) v1(13.36,32.97) v1(13.82,44.58) v1(13.84,37.16) v1(13.84,7.16) v1(13.89,16.66) v1(13.92,8.89) v1(14.33,41.43) v1(14.3,13.41) v1(14.48,32.97) v1(14.91,44.55) v1(15.16,40.92) v1(15.34,3.1) v1(15.37,8.33) v1(15.54,11.15) v1(15.6,31.62) v1(15.77,41.83) v1(15.9,4.98) v1(16.18,0.56) v1(16.33,44.53) v1(16.41,25.53) v1(16.54,22.45) v1(16.66,18.72) v1(16.76,35.26) v1(16.87,9.86) v1(16.92,6.83) v1(17.25,44.53) v1(17.45,26.72) v1(17.48,34.11) v1(17.63,39.8) v1(17.96,20.55) v1(18.34,40.46) v1(18.69,5.69) v1(18.85,21.18) v1(18.92,44.5) v1(19.08,15.24) v1(19.18,10.87) v1(19.3,41.07) v1(19.66,9.88) v1(19.86,2.54) v1(20.5,3.66) v1(20.7,10.95) v1(20.7,9.09) v1(21.18,15.32) v1(21.21,6.81) v1(21.74,27.46) v1(21.77,40.16) v1(22,35.38) v1(22.58,9.09) v1(23.14,22.4) v1(23.67,9.86) v1(23.9,33.96) v1(23.88,6.86) v1(23.98,22.71) v1(24.18,24.51) v1(24.56,10.57) v1(25.04,15.16) v1(25.43,35.51) v1(25.68,19.33) v1(25.65,8.99) v1(26.01,11.96) v1(26.14,10.46) v1(26.34,48.47) v1(26.31,18.64) v1(26.31,6.83) v1(26.44,29.16) v1(26.47,30.35) v1(26.49,27.58) v1(26.64,9.37) v1(26.62,7.82) v1(27.97,6.07) v1(27.99,3.86) v1(28.12,25.22) v1(28.3,7.87) v1(28.42,29.21) v1(28.37,27.48) v1(28.6,20.78) v1(29.16,41.53) v1(29.41,32.61) v1(29.69,15.93) v1(30.05,40.51) v1(30.23,3.7) v1(30.23,0.64) v1(30.76,43.64) v1(30.86,39.24) v1(31.27,48.54) v1(31.32,46.96) v1(31.83,42.8) v1(31.8,16.54) v1(31.85,45.21) v1(32.44,0.66) v1(32.87,47.96) v1(32.89,46.33) v1(32.89,44.48) v1(32.87,41.71) v1(33.02,15.57) v1(33.22,6.76) v1(33.81,26.14) v1(33.96,35.48) v1(33.96,31.5) v1(34.14,22.45) v1(34.82,20.73) v1(34.87,35.48) v1(35.23,17.5) v1(35.36,15.04) v1(35.46,9.27) v1(35.51,8.2) v1(35.46,6.83) v1(35.74,37.13) v1(36.14,34.29) v1(36.14,28.47) v1(36.42,37.77) v1(37.06,45.16) v1(37.06,37.21) v1(37.08,22.83) v1(37.36,29.69) v1(37.57,35.36) v1(37.77,11.28) v1(38.13,20.45) v1(38.15,26.59) v1(38.38,39.27) v1(38.51,45.24) v1(38.94,25.25) v1(38.91,19.38) v1(38.94,15.16) v1(39.04,36.96) v1(39.01,17.02) v1(39.07,22.86) v1(39.22,41) v1(39.65,31.9) v1(39.75,25.43) v1(39.85,37.62) v1(39.88,6.6) v1(40.11,39.22) v1(40.16,41.2) v1(40.72,26.31) v1(40.72,11.89) v1(40.79,43.21) v1(40.79,8.46) v1(41.99,0.81) v1(42.39,8.36) v1(42.47,29.08) v1(43.05,19.28) v1(43.1,15.88) v1(43.31,14.5) v1(43.48,45.24) v1(43.54,8.15) v1(43.54,6.78) v1(43.54,4.78) v1(43.59,48.36) v1(43.79,26.54) v1(43.92,13.67) v1(44.07,42.75) v1(44.42,46.28) v1(45.42,28.68) v1(46.84,26.52) v1(46.86,28.75) v1(49.15,28.8) v1(49.12,26.62) v1(49.15,0.94) v1(49.23,47.4) v1(49.2,45.39) v1(49.2,43.46) v1(49.23,41.27) v1(49.23,35.43) v1(49.23,33.4) v1(49.28,39.5) v1(49.25,37.36) v1(49.25,31.55)
VBAT: length 3.6
  TOP w0.152: U1.6 19.03,18.04 18.88,18.19 v2(18.88,18.72)
  BOTTOM w0.508: BAT2.1 18.8,17.58 18.8,18.64 v2(18.88,18.72)
VDDA: length 11.9
  TOP w0.203: U1.22 27.03,15.54 27.14,15.43
  TOP w0.381: R16.2 31.67,13.8 31.07,14.41 30.89,14.41 30.77,14.53 30.75,14.53 30.12,15.15 28.61,15.15 28.37,15.39 27.18,15.39 27.14,15.43 ; R16.2 31.67,12.98 31.55,12.85 ; R16.2 31.8,13.87 L2.2 ; 31.55,12.85 30.79,12.09 C17.2 ; 31.55,12.85 C16.1
ADC0: length 20.2
  TOP w0.203: U1.15 23.53,15.69 23.35,15.51 v1(23.35,15)
  BOTTOM w0.203: R27.2 9.98,9.73 C193.2 11.2,11.94 13.91,14.65 23,14.65 v1(23.35,15)
ADC1: length 20.1
  TOP w0.203: v1(24.18,14.99) 24.18,15.49 24.03,15.64 U1.16
  BOTTOM w0.203: v1(24.18,14.99) 24.54,14.63 26.49,14.63 26.9,14.22 26.9,11.09 26.92,11.06 26.92,10.9 32.11,5.71 32.24,5.71 32.5,5.46 32.6,5.46 32.7,5.36 34.79,5.36 JP11.2
ADC1_EN: length 46.1
  TOP w0.152: U1.67 20.53,33.44 20.95,33.86 v1(20.95,34.95) ; v1(20.78,22.66) 21.12,22.99 21.12,27.43 20.7,27.84 v1(19.28,27.84)
  BOTTOM w0.152: JP11.3 37.86,9.28 35.63,11.51 35.61,11.51 34.8,12.32 34.24,12.32 29.57,16.99 29.57,17 29.2,17.36 29.2,18.17 28.54,18.83 28.54,18.84 28.25,19.14 28.23,19.14 27.36,20.02 24.61,20.02 21.97,22.66 v1(20.78,22.66) ; v1(19.28,27.84) 19.76,28.32 19.76,28.81 19,29.57 19,32.99 v1(20.95,34.95)
BOOT0: length 36
  TOP w0.152: v1(5.74,23.9) 5.33,24.31 5.33,30.72 1.96,34.09 ; U1.94 10.25,21.73 9.42,20.9 v1(8.56,20.9) ; 1.96,34.09 SW8.1 ; 1.96,34.09 2.24,34.37 2.24,38.66 1.05,39.84 SW8.2 1.05,41.44 1.73,41.44 4.51,44.22 R12.1
  BOTTOM w0.152: v1(5.74,23.9) 6.08,23.56 6.08,23.39 v1(8.56,20.9)
CLK32K-IN: length 10.6
  TOP w0.152: U1.8 20.03,15.83 19.72,15.51 19.72,14.7 18.77,13.75 R37.1 C65.2 17.3,13.63 16.19,12.52 13.91,12.52 13.49,12.11 X3.1
CLK32K-OUT: length 11.4
  TOP w0.152: X3.2 14.39,12.08 14.53,12.22 16.13,12.22 16.38,11.96 C67.2 16.97,12.61 17.23,12.88 19.44,12.88 20.19,13.63 R37.2 20.19,15.42 20.53,15.76 U1.9
DBGACK: length 2.3
  BOTTOM w0.152: J10.19 44.54,1.96 44.34,1.75 R29.2
DBGRQ: length 2.7
  BOTTOM w0.152: R30.2 44.53,3.43 J10.17
I2C1_INT: length 29.9
  TOP w0.152: 38.9,23.89 38.66,24.13 R17.2 ; 38.9,23.89 38.85,23.89 38,23.04 v1(38,22.1) ; 38.9,23.89 JP6.6 ; U1.95 15.74,21.23 15.76,21.21 v1(16.81,21.21)
  BOTTOM w0.152: v1(38,22.1) 37.66,21.76 26.58,21.76 25.68,22.66 25.66,22.66 24.82,23.5 24.33,23.5 24.31,23.52 23.64,23.52 23.62,23.5 18.62,23.5 16.81,21.69 v1(16.81,21.21)
I2C1_SCL: length 17.2
  TOP w0.152: v1(10.85,22.91) 11.32,22.91 11.5,22.73 U1.92 ; 6.43,26.9 6.38,26.85 R21.2 ; 6.43,26.9 6.46,26.94 6.46,27.01 6.4,27.08 v1(6.4,27.25) ; 6.43,26.9 6.43,28.68 7.04,29.29 U27.6
  BOTTOM w0.152: v1(6.4,27.25) 6.93,27.78 8.46,27.78 8.78,27.46 8.78,25.56 10.85,23.5 v1(10.85,22.91)
I2C1_SDA: length 12.5
  TOP w0.152: v1(10.29,22.33) 10.77,22.33 10.86,22.23 U1.93 ; R22.2 8,27.1 ; 8,27.1 v1(8,27.28) ; 8,27.1 8.41,27.51 U27.5
  BOTTOM w0.152: v1(8,27.28) 8.48,26.8 8.48,25.22 10.29,23.42 v1(10.29,22.33)
I2C1_SMBAL: length 27.4
  TOP w0.152: JP6.5 39.09,21.89 v1(38.66,21.46) ; v1(18.41,22.25) 17.43,23.23 U1.91
  BOTTOM w0.152: v1(38.66,21.46) 38.18,21.46 38.08,21.36 28.65,21.36 28.61,21.41 28.19,21.41 28.14,21.36 26.53,21.36 24.7,23.19 24.21,23.19 24.19,23.21 23.77,23.21 23.75,23.19 19.35,23.19 v1(18.41,22.25)
I2C2_SCL: length 22.5
  TOP w0.152: v1(33.15,30.53) 32.23,29.62 32.08,29.62 31.62,29.16 31.31,29.16 31.24,29.23 U1.47 ; v1(35.13,22.38) 35.47,22.04 35.47,21.3 37.34,19.43 37.34,17.08 37.95,16.47 R14.2 38.53,16.41 39.05,15.89 JP6.2
  BOTTOM w0.152: v1(35.13,22.38) 35.47,22.72 35.47,26.66 33.15,28.98 v1(33.15,30.53)
I2C2_SDA: length 22
  TOP w0.152: v1(36.15,22.56) 36.15,21.05 37.95,19.25 R15.2 38.53,18.03 38.67,17.89 JP6.3 ; U1.48 31.24,29.73 31.25,29.74 31.78,29.74 31.95,29.92 32.03,29.92 32.64,30.54 32.64,31.07 v1(33.14,31.57)
  BOTTOM w0.152: v1(36.15,22.56) 35.81,22.89 35.81,27.36 33.58,29.59 33.58,30.25 33.71,30.38 33.71,31.01 v1(33.14,31.57)
IRDA_RX: length 19.6
  TOP w0.152: v1(27.28,18.64) 27.3,18.64 27.53,18.42 U1.23 ; JP12.3 29.01,1.71 29.01,10.06 v1(29.06,10.11)
  BOTTOM w0.152: v1(29.06,10.11) 27.62,11.55 27.62,18.31 v1(27.28,18.64)
IRDA_TX: length 20.5
  TOP w0.152: U1.24 28.03,18.38 28.04,18.38 v1(28.04,18.63) ; v1(29.87,9.93) 29.31,9.37 29.31,3.41 JP12.4
  BOTTOM w0.152: v1(29.87,9.93) 29.56,10.24 29.56,10.32 29.27,10.61 29.19,10.61 28.04,11.77 v1(28.04,18.63)
KEY1: length 26.2
  TOP w0.152: U1.98 12.77,19.73 10.87,17.83 10.87,17.81 10.62,17.56 v1(10.62,16.79) ; v1(11.25,2.13) 9.67,2.13 SW6.2 9.5,2.29 6.76,5.03 v1(6.76,5.26)
  BOTTOM w0.152: v1(10.62,16.79) 7.26,13.44 7.26,5.77 v1(6.76,5.26) ; R24.2 11.68,1.7 v1(11.25,2.13)
KEY2: length 26.3
  TOP w0.152: 5.79,2.01 5.72,2.01 v1(5.49,1.78) ; 5.79,2.01 SW9.2 ; 5.79,2.01 5.49,2.31 v1(5.49,5.31) ; v1(10.05,17.42) 10.57,17.94 10.57,17.96 12.84,20.23 U1.97
  BOTTOM w0.152: v1(5.49,5.31) 6.96,6.78 6.96,13.77 7.24,14.05 9.53,16.34 10.05,16.86 v1(10.05,17.42) ; v1(5.49,1.78) 5.13,1.42 R25.2
LED1: length 26.1
  TOP w0.152: U1.63 22.53,33.46 25.49,36.42 31.24,36.42 36.45,41.63 36.45,47.7 v1(36.68,47.93)
  BOTTOM w0.152: v1(36.68,47.93) 37.1,47.93 37.74,48.58 R18.1
LED2: length 24.1
  TOP w0.152: U1.64 22.03,33.56 25.2,36.73 31.11,36.73 35.71,41.33 v1(35.71,41.99)
  BOTTOM w0.152: R19.1 37.74,44.4 35.71,42.37 v1(35.71,41.99)
MOT: length 39.9
  TOP w0.152: R26.2 21.05,0.81 Q4.2 19.67,0.91 17.59,2.99 17.2,2.99 v1(16.87,3.33) ; v1(9.32,16.84) 9.32,17.48 12.58,20.73 U1.96
  BOTTOM w0.152: v1(16.87,3.33) 16.53,3.67 5.66,3.67 4.9,4.42 4.9,9 6.65,10.75 6.65,14.76 8.74,16.84 v1(9.32,16.84)
OSC_IN: length 11.5
  TOP w0.152: Y1.2 21.31,8.28 21.51,8.48 21.51,10.54 22.08,11.11 22.08,11.38 21.54,11.93 C6.2 21.54,13.67 R7.1 21.59,14.58 22.03,15.02 U1.12
OSC_OUT: length 11.6
  TOP w0.152: Y1.1 22.12,8.28 21.92,8.48 21.92,10.37 22.61,11.06 22.61,11.63 22.81,11.84 22.94,11.84 C9.2 23.09,13.64 R7.2 23.01,14.4 22.53,14.88 U1.13
PB0: length 21.5
  TOP w0.152: J13.3 47.01,31.33 41.29,31.33 33.19,23.23 U1.35
PB1: length 19.3
  TOP w0.152: U1.36 33.21,23.73 41.15,31.68 45.36,31.68 J13.4
PB2: length 3.5
  TOP w0.152: U1.37 v1(27.48,24.23)
  BOTTOM w0.152: v1(27.48,24.23) 26.87,24.23 R4.1
PC2: length 32.8
  TOP w0.152: U1.17 24.53,20.04 v1(27.58,23.09) ; J13.5 47.01,33.33 45.63,33.33 44.43,32.13 41.12,32.13 33.25,24.26 v1(32.33,24.26)
  BOTTOM w0.152: v1(32.33,24.26) 30.83,22.75 27.92,22.75 v1(27.58,23.09)
PC3: length 29.9
  TOP w0.152: J13.6 44.22,32.54 41.04,32.54 33.35,24.84 v1(32.87,24.84) ; v1(28.57,23.37) 28.09,22.88 28.09,22.88 27.79,22.58 27.79,22.58 25.03,19.83 U1.18
  BOTTOM w0.152: v1(28.57,23.37) 30.48,23.37 31.95,24.84 v1(32.87,24.84)
PC4: length 25.7
  TOP w0.152: U1.33 33.05,22.23 34.14,23.32 40.67,29.85 v1(43.88,29.85)
  BOTTOM w0.152: J13.7 47.04,35.36 47.04,31.83 46.55,31.33 45.63,31.33 45.61,31.32 45.34,31.32 44.22,30.2 44.22,30.19 v1(43.88,29.85)
PC5: length 22.9
  TOP w0.152: U1.34 33.12,22.73 40.56,30.17 42.36,30.17 v1(42.85,30.66)
  BOTTOM w0.152: v1(42.85,30.66) 44.91,32.72 44.91,35.23 J13.8
PD0: length 13.6
  TOP w0.152: J14.19 4.76,23.4 7.7,23.4 11.31,27 12.46,27 13.7,28.23 U1.81
PD1: length 15.7
  TOP w0.152: U1.82 13.8,27.73 12.72,26.65 11.39,26.65 7.83,23.09 4.52,23.09 4.06,23.55 2.61,23.55 J14.20
PD3: length 15.8
  TOP w0.152: 13.25,26.73 13.24,26.73 13.15,26.64 ; 13.25,26.73 U1.84 ; 13.25,26.73 12.86,26.34 11.51,26.34 7.96,22.79 5.28,22.79 4.04,21.55 2.61,21.55 J14.18
PD4: length 17
  TOP w0.152: U1.85 13.18,26.23 12.98,26.04 11.64,26.04 8.08,22.48 5.82,22.48 4.61,21.27 4.61,20.12 4.04,19.55 2.61,19.55 J14.16
PD5: length 13.3
  TOP w0.152: v1(5.46,21.41) 6.23,22.18 8.21,22.18 9.87,23.84 11.77,25.73 U1.86
  BOTTOM w0.152: v1(5.46,21.41) 4.52,21.41 J14.15
PD6: length 15.9
  TOP w0.152: v1(5.28,20.37) 6.79,21.87 8.34,21.87 9.26,22.79 11.7,25.23 U1.87
  BOTTOM w0.152: J14.14 2.65,19.55 4.46,19.55 v1(5.28,20.37)
PD7: length 13.7
  TOP w0.152: J14.13 4.64,19.53 6.43,19.53 8.71,21.82 11.63,24.73 U1.88
PD8: length 30.9
  TOP w0.152: J13.19 47.01,47.33 42.35,47.33 42.34,47.32 41.53,47.32 41.52,47.33 41.01,47.33 40.61,46.94 40.61,45.64 37.78,42.81 37.78,42.1 31.49,35.81 27.05,35.81 26.53,35.3 U1.55
PD9: length 30.7
  TOP w0.152: U1.56 26.03,35.23 26.92,36.12 31.37,36.12 37.25,42 37.25,42.84 40.21,45.8 40.21,47.96 41.53,49.28 45.1,49.28 J13.20
PD10: length 37.9
  TOP w0.152: v1(25.53,26.04) U1.57
  BOTTOM w0.152: J14.3 4.31,9.2 4.31,9.21 6.25,11.15 6.25,15.09 14.25,23.09 16.39,23.09 17.22,23.09 18.16,24.03 21.97,24.03 22.48,24.03 23.16,24.71 23.16,24.71 23.34,24.89 23.52,25.07 23.52,25.07 24.15,25.7 25.19,25.7 v1(25.53,26.04)
PD11: length 39.1
  TOP w0.152: U1.58 25.03,26.49 v1(24.82,26.28)
  BOTTOM w0.152: J14.4 2.65,9.55 4.09,9.55 5.94,11.4 5.94,15.22 14.12,23.39 16.01,23.39 16.51,23.39 17.02,23.39 17.96,24.33 22.35,24.33 23.03,25.02 23.21,25.19 23.39,25.37 23.39,25.37 24.3,26.28 v1(24.82,26.28)
PD12: length 35.4
  TOP w0.152: v1(24.51,26.97) 24.51,27.3 24.63,27.43 24.63,27.84 24.53,27.94 U1.59
  BOTTOM w0.152: J14.5 4.3,10.53 5.64,11.86 5.64,15.34 13.99,23.7 16.13,23.7 16.89,23.7 17.83,24.64 22.22,24.64 22.91,25.32 23.09,25.5 24.17,26.58 24.17,26.63 v1(24.51,26.97)
PD13: length 36.9
  TOP w0.152: v1(24.13,27.64) 24.13,28.11 24.03,28.21 U1.60
  BOTTOM w0.152: J14.6 2.61,11.51 4.85,11.51 5.33,11.99 5.33,15.47 13.87,24 16.26,24 16.26,24 16.77,24 16.77,24 17.71,24.94 22.1,24.94 22.78,25.63 22.78,26.29 v1(24.13,27.64)
PD14: length 32.5
  TOP w0.152: v1(23.48,28.02) 23.48,28.5 23.53,28.55 U1.61
  BOTTOM w0.152: v1(23.48,28.02) 23.15,27.68 23.14,27.68 22.47,27.02 22.47,25.75 21.97,25.25 17.58,25.25 16.64,24.31 13.74,24.31 7.22,17.78 7.21,17.78 6.86,17.43 5.03,15.6 5.03,13.92 4.31,13.2 4.31,13.2 J14.7
PD15: length 33.9
  TOP w0.152: v1(22.94,28.54) 22.94,29.02 23.03,29.11 U1.62
  BOTTOM w0.152: J14.8 2.62,13.51 4,13.51 4.72,14.24 4.72,15.72 6.55,17.55 7.09,18.09 9,20 13.61,24.61 16.51,24.61 17.45,25.55 21.84,25.55 22.17,25.88 22.17,27.15 22.94,27.91 22.94,28.06 22.94,28.06 v1(22.94,28.54)
PE3: length 15.1
  TOP w0.152: U1.2 17.03,16.03 16.42,15.42 4.74,15.42 J14.11
PE4: length 18.3
  TOP w0.152: J14.12 2.61,15.55 4.04,15.55 4.47,15.11 17.36,15.11 17.53,15.29 U1.3
PE5: length 16.5
  TOP w0.152: U1.4 18.03,15.09 17.73,14.78 4.84,14.78 4.59,14.53 J14.9
PE6: length 19.9
  TOP w0.152: U1.5 18.53,14.93 18.08,14.48 5.31,14.48 4.38,13.55 2.61,13.55 J14.10
PE7: length 23.4
  TOP w0.152: U1.38 31.63,24.73 39.74,32.84 43.89,32.84 44.78,33.73 44.78,37.1 J13.10
PE8: length 24.7
  TOP w0.152: v1(43.69,33.35) 39.7,33.35 31.58,25.23 U1.39
  BOTTOM w0.152: J13.9 47.01,37.33 45.05,37.33 44.55,36.83 44.55,34.21 v1(43.69,33.35)
PE9: length 24.4
  TOP w0.152: v1(43.1,33.95) 39.87,33.95 31.65,25.73 U1.40
  BOTTOM w0.152: J13.12 45,40.35 43.94,39.29 43.94,35.41 43.1,34.57 v1(43.1,33.95)
PE10: length 25.6
  TOP w0.152: U1.41 31.72,26.23 39.99,34.5 v1(43.98,34.5)
  BOTTOM w0.152: J13.11 47,39.32 46.45,39.32 46.44,39.33 45.36,39.33 44.24,38.22 44.24,35.28 43.98,35.02 v1(43.98,34.5)
PE11: length 25
  TOP w0.152: U1.42 31.79,26.73 40.24,35.18 43.64,35.18 44.09,35.64 44.09,40.42 J13.14
PE12: length 26.3
  TOP w0.152: U1.43 31.86,27.23 40.32,35.69 42.63,35.69 42.8,35.86 v1(43.43,35.86)
  BOTTOM w0.152: J13.13 47.01,41.33 44.91,41.33 43.43,39.85 v1(43.43,35.86)
PE13: length 26.1
  TOP w0.152: U1.44 31.93,27.73 40.39,36.2 v1(42.42,36.2)
  BOTTOM w0.152: J13.16 45.21,43.54 43.92,43.54 42.91,42.53 42.91,37.46 42.42,36.96 v1(42.42,36.2)
PE14: length 26.5
  TOP w0.152: U1.45 32,28.23 40.65,36.88 42.77,36.88 43.46,37.57 43.46,41.17 45.63,43.33 47.01,43.33 J13.15
PE15: length 26.4
  TOP w0.152: J13.18 43.15,43.48 43.15,37.7 42.64,37.19 40.51,37.19 32.06,28.73 U1.46
RESET#: length 38.3
  TOP w0.152: v1(41.71,6.22) 41.17,5.69 v1(35.89,5.69) ; U1.14 v1(23.03,18.8)
  BOTTOM w0.152: R5.2 21.54,21.46 21.92,21.08 23.01,21.08 23.8,20.29 23.8,19.6 23.37,19.17 23.37,19.14 v1(23.03,18.8) 24.49,18.8 27.23,16.06 27.23,11.23 28.85,9.61 28.85,9.61 32.67,5.79 32.74,5.79 32.83,5.69 v1(35.89,5.69) ; J10.15 44.17,5.61 42.32,5.61 v1(41.71,6.22)
RTCK: length 3.9
  BOTTOM w0.152: R31.1 R28.1 44.39,11.96 44.54,12.12 J10.11
SPI1_MISO: length 20.4
  TOP w0.152: U1.31 32.23,21.23 33.37,20.1 35.5,20.1 v1(35.86,19.74) ; v1(37.74,12.37) 37.41,12.03 37.41,11.98 36.83,11.41 36.44,11.01 36.44,7.87 36.46,7.85 U6.2
  BOTTOM w0.152: v1(37.74,12.37) 37.41,12.71 37.41,13.85 37.08,14.18 37.08,17.86 35.86,19.08 v1(35.86,19.74)
SPI1_MOSI: length 19.2
  TOP w0.152: U6.5 34.52,10.39 35.89,11.76 v1(35.89,13.59) ; U1.32 33.38,21.73 33.68,21.44 v1(33.68,20.6)
  BOTTOM w0.152: v1(35.89,13.59) 35.89,14.07 35.92,14.09 35.92,17.63 33.68,19.86 v1(33.68,20.6)
SPI1_NSS: length 20.9
  TOP w0.152: U6.1 38.37,6.58 39.65,7.86 R23.2 39.71,8.84 40.46,9.59 40.46,10.82 35.43,15.85 35.12,15.85 34.67,16.31 34.67,17.47 32.46,19.68 32.46,19.68 31.91,20.23 U1.29
SPI1_SCK: length 20.1
  TOP w0.152: U1.30 32.1,20.73 33.3,19.53 v1(35.14,19.53) ; v1(36.57,13.06) 36.57,12.58 36.53,12.53 36.53,11.53 34.11,9.12 U6.6
  BOTTOM w0.152: v1(35.14,19.53) 35.14,19.05 35.24,18.95 35.24,18.89 36.57,17.55 v1(36.57,13.06)
SPI2_MISO: length 20.8
  TOP w0.152: JP7.4 40.9,44.3 31.88,35.28 31.82,35.28 31.74,35.2 27.71,35.2 27.53,35.03 U1.53
SPI2_MOSI: length 22.5
  TOP w0.152: JP7.5 40.36,44.73 40.36,44.25 31.62,35.51 27.34,35.51 27.03,35.2 U1.54
SPI2_NSS: length 17.6
  TOP w0.152: U1.51 28.53,34.15 28.98,34.59 32.13,34.59 37.84,40.3 JP7.2
SPI2_SCK: length 19.2
  TOP w0.152: U1.52 28.03,34.59 28.34,34.9 32,34.9 39.41,42.3 JP7.3
TCK/SWCLK: length 47.1
  TOP w0.152: v1(20.44,30.27) 19.97,30.27 19.5,30.73 U1.76
  BOTTOM w0.152: v1(20.44,30.27) 20.78,30.61 20.78,32.29 23.04,34.54 34.44,34.54 43.76,25.23 43.76,16.49 J10.9
TDI: length 41.8
  TOP w0.152: v1(42.98,21.06) 44.27,21.06 J10.5 ; v1(19.63,29.79) 19.19,30.23 U1.77
  BOTTOM w0.152: v1(42.98,21.06) 42.98,23.14 43.46,23.62 43.46,25.1 34.44,34.11 25.02,34.11 20.7,29.79 20.68,29.79 20.65,29.77 20.13,29.77 20.1,29.79 v1(19.63,29.79)
TDO/SWO: length 53.5
  TOP w0.152: U1.89 15.9,24.23 18.06,26.39 18.06,26.8 18.6,27.33 19.53,27.33 19.74,27.13 v1(20.22,27.13) ; v1(42.3,24.9) 42.3,12.87 J10.13
  BOTTOM w0.152: v1(42.3,24.9) 41.97,25.23 41.97,25.8 37.87,29.9 37.87,29.9 37.57,30.2 37.57,30.2 34.06,33.71 25.2,33.71 22.38,30.89 22.38,29.46 20.56,27.64 20.56,27.47 v1(20.22,27.13)
TF0_CD: length 21.1
  TOP w0.152: 12.68,28.45 12.5,28.45 12.44,28.44 12.39,28.42 12.34,28.39 12.33,28.37 R48.2 ; 12.68,28.45 11.96,28.45 ; 12.68,28.45 12.7,28.43 ; 12.68,28.45 12.7,28.43 ; 12.7,28.43 v1(13.18,28.43) ; U1.7 19.53,22.3 19.3,22.54 19.3,25.75 v1(19.63,26.09)
  BOTTOM w0.152: 13.09,27.94 12.01,27.94 CON105.9 ; 13.09,27.94 13.15,28 13.15,28.14 13.18,28.16 v1(13.18,28.43) ; 13.09,27.94 13.07,27.92 13.07,26.99 13.89,26.16 19.08,26.16 19.16,26.09 v1(19.63,26.09)
TF0_CLK: length 12
  TOP w0.152: U1.80 15.74,28.73 16.26,28.21 16.27,28.21 16.59,27.89 v1(17.07,27.89)
  BOTTOM w0.152: CON105.5 15.87,32.14 17.7,30.3 17.7,29 17.07,28.37 v1(17.07,27.89)
TF0_CMD: length 16
  TOP w0.152: v1(17.88,27.97) 17.12,27.2 15.79,27.2 15.76,27.23 U1.83 ; v1(12.95,34.62) 11.96,33.63 R47.2
  BOTTOM w0.152: CON105.3 12.67,34.34 ; 12.67,34.34 v1(12.95,34.62) ; 12.67,34.34 14.56,34.34 18.06,30.84 18.06,28.62 17.88,28.44 v1(17.88,27.97)
TF0_D0: length 16.7
  TOP w0.152: U1.65 21.53,29.06 21.26,28.78 20.34,28.78 19.83,29.29 19.42,29.29 19.17,29.54 v1(16.94,29.54) ; R49.2 12.8,31.6 v1(13.34,31.06)
  BOTTOM w0.152: 12.92,30.1 12.76,29.94 CON105.7 ; 12.92,30.1 12.92,30.77 13.21,31.06 v1(13.34,31.06) ; 12.92,30.1 16.38,30.1 v1(16.94,29.54)
TF0_D1: length 16.6
  TOP w0.152: R50.2 12.34,30 ; 12.34,30 12.27,30.07 11.99,30.07 ; 12.34,30 13.16,29.18 v1(13.18,29.18) ; v1(20.98,29.34) 20.98,29.82 21.03,29.87 U1.66
  BOTTOM w0.152: 13.36,29.01 13.36,29 13.52,28.84 13.52,28.82 15.04,27.3 19.63,27.3 20.98,28.65 v1(20.98,29.34) ; 13.36,29.01 11.98,29.01 CON105.8 ; 13.36,29.01 13.31,29.06 13.31,29.06 v1(13.18,29.18)
TF0_D2: length 19
  TOP w0.152: v1(19.25,28.6) 18.87,28.98 16.51,28.98 15.76,29.73 U1.78 ; R51.2 12.57,36.75 v1(12.7,36.88)
  BOTTOM w0.152: v1(12.7,36.88) 12.16,36.88 CON105.1 13.73,36.54 18.67,31.6 18.67,29.18 v1(19.25,28.6)
TF0_D3: length 17.3
  TOP w0.152: U1.79 15.74,29.23 16.45,28.52 18.26,28.52 v1(18.6,28.18) ; v1(12.83,35.74) 12.55,35.74 R52.2
  BOTTOM w0.152: v1(18.6,28.18) 18.6,28.82 18.36,29.06 18.36,31.27 14.19,35.44 12.53,35.44 ; CON105.2 12.53,35.44 ; 12.53,35.44 v1(12.83,35.74)
TMS/SWDIO: length 42.5
  TOP w0.152: U1.72 18.03,31.32 18.31,31.04 19.63,31.04 19.75,30.91 v1(20.05,30.91)
  BOTTOM w0.152: v1(20.05,30.91) 20.05,32.14 22.78,34.87 34.54,34.87 44.06,25.35 44.06,18.72 J10.7
TRST: length 40.9
  TOP w0.152: v1(18.96,26.71) 15.99,23.73 U1.90 ; J10.3 44.04,23.83 v1(42.95,23.83)
  BOTTOM w0.152: v1(42.95,23.83) 42.47,23.83 32.92,33.38 25.3,33.38 22.68,30.76 22.68,29.24 21.11,27.66 21.11,26.77 20.96,26.62 19.52,26.62 19.44,26.71 v1(18.96,26.71)
USART0_RX: length 26.4
  TOP w0.152: U1.69 19.53,34.54 v1(19.94,34.95)
  BOTTOM w0.152: J9.2 3.94,47.76 3.94,47.72 4.93,46.74 4.93,44.2 9.32,39.8 12.03,39.8 14.05,37.79 14.05,37.77 14.53,37.29 16.99,37.29 19.33,34.95 v1(19.94,34.95)
USART0_TX: length 26.5
  TOP w0.152: v1(20.62,35.69) 20.44,35.5 20.44,34.29 20.03,33.88 U1.68
  BOTTOM w0.152: J9.3 5.27,44.29 9.45,40.11 12.16,40.11 14.35,37.92 14.35,37.9 14.66,37.59 17.2,37.59 19.1,35.69 v1(20.62,35.69)
USART2_RX: length 24.3
  TOP w0.152: v1(30.35,17.96) 30.28,18.03 U1.26
  BOTTOM w0.152: v1(30.35,17.96) 30.35,17.07 34.5,12.92 35.05,12.92 35.41,12.57 35.86,12.12 35.88,12.12 38.47,9.54 38.47,9.54 41.02,6.99 41.02,2.95 40.89,2.82 39.03,2.82 JP10.3
USART2_TX: length 23.5
  TOP w0.152: v1(29.71,17.57) 29.12,16.98 U1.25
  BOTTOM w0.152: JP10.2 37.31,3.1 38.56,3.1 38.88,3.42 38.88,8.7 38.34,9.23 38.34,9.23 35.76,11.82 35.73,11.82 34.93,12.62 34.37,12.62 30.05,16.94 30.05,17.23 v1(29.71,17.57)
USB_DM: length 12.7
  TOP w0.152: U1.70 19.03,34.59 16.71,36.91 16.71,40.72 16.92,40.92 17.56,40.92 18.29,41.66 18.29,42.03 DOWN4.2
USB_DP: length 13.1
  TOP w0.152: DOWN4.3 17.89,42.03 17.89,41.82 17.39,41.33 16.75,41.33 16.41,40.99 16.41,39.83 16.31,39.73 ; 16.31,39.73 16.41,39.62 16.41,36.78 18.53,34.65 U1.71 ; 16.31,39.73 16.28,39.7 R10.2
USB_M: length 42.3
  TOP w0.152: v1(5.03,16.81) 6.12,15.72 15.87,15.72 16.53,16.38 U1.1 ; Q3.2 11.09,39.16 v1(10.54,38.61)
  BOTTOM w0.152: v1(5.03,16.81) 6.02,17.81 6.02,22.5 5.05,23.47 5.05,37.01 6.65,38.61 v1(10.54,38.61)
USBVBUS: length 20.4
  TOP w0.152: 28.38,48.44 J12.1 ; J12.1 29.06,49.12 ; J12.1 29.74,48.44 ; J12.1 29.06,47.76 ; DOWN4.1 22.53,42.82 ; DOWN4.1 21.59,41.88 ; DOWN4.1 20.65,42.82 ; DOWN4.1 21.59,43.77
  BOTTOM w0.381: J12.1 27.81,47.19 27.81,42.14 27.15,41.48 22.94,41.48 DOWN4.1
VREF: length 6.1
  TOP w0.203: U1.21 26.53,15.25
  TOP w0.381: 26.53,15.25 27.05,14.73 27.85,14.73 28.8,13.78 C18.2 29.5,13.72 29.53,13.74 R16.1
VREF-: length 3.3
  TOP w0.203: 25.83,15.52 25.83,15.81 26.03,16.01 U1.20
  TOP w0.381: R8.1 25.83,15.52
N287128: length 1.8
  TOP w0.254: D2.1 2.35,44.92 2.26,45.01 R9.2
N15834662: length 2.3
  TOP w0.152: R10.1 13.33,39.7 12.99,40.04 Q3.1
N15844638: length 1.9
  TOP w0.152: 39.26,48.64 39.6,48.64 39.62,48.67
  TOP w0.254: v1(39.85,48.9) 39.62,48.67 D3.1
  BOTTOM w0.152: v1(39.85,48.9) 39.42,48.9 R18.2
N15844642: length 3
  TOP w0.152: v1(39.7,47.4) 39.7,47.13 39.26,46.69
  TOP w0.254: D4.1 39.21,46.9 v1(39.7,47.4)
  BOTTOM w0.152: R19.2 39.17,47.28 39.28,47.4 v1(39.7,47.4)
N15845249: length 7.6
  TOP w0.508: Q4.3 v2(18.72,4.27)
  BOTTOM w0.508: v2(18.72,4.27) 18.72,3.23 17.02,1.52 U15.2
N15864601: length 4.5
  TOP w0.254: R20.1 C192.2 24.84,3.8 25.12,3.52 JP12.1
N15869244: length 10.5
  TOP w0.152: SW8.3 SW8.4 5.55,43.64 6.21,44.3 R13.2

## Copper pours and planes (outline as drawn; the poured copper is in the pictures)
GND on TOP: 0.64,0.03 0.2,0.2 0.03,0.64 0.03,49.37 0.2,49.8 0.63,49.97 10.16,49.96 10.59,49.78 10.77,49.35 10.77,45.64 25.45,45.67 25.43,49.37 25.61,49.81 26.04,49.99 49.37,49.97 49.8,49.8 49.97,49.37 49.97,0.64 49.8,0.2 49.37,0.03 ; 15 cut-outs
GND on BOTTOM: 0.64,0.03 0.2,0.2 0.03,0.64 0.03,49.37 0.2,49.8 0.63,49.97 10.16,49.96 10.59,49.78 10.77,49.35 10.77,45.64 25.45,45.67 25.43,49.37 25.61,49.81 26.04,49.99 49.37,49.97 49.8,49.8 49.97,49.37 49.97,0.64 49.8,0.2 49.37,0.03 ; 20 cut-outs
USBVBUS on TOP: 20.5,45.26 20.4,41.25 20.6,40.69 27.86,40.67 28.4,41.3 28.32,43.99 28.52,44.35 30.66,44.68 30.66,49.45 28.4,49.45 25.78,46.84 25.78,45.69 25.52,45.49 20.75,45.26 20.7,45.31 20.55,45.31

## Text on the board
Ref Des/Silkscreen Top: SW9 | SW6 | studyboy_3w@163.com | 2013-05-01
NCLEGEND-1-2: FIGURE | SIZE | 11.811 | 15.748 | 23.618 | 27.559 | 31.5 | 35.429 | 39.37 | DRILL CHART: TOP to BOTTOM | ALL UNITS ARE IN MILS | PLATED | NON-PLATED | QTY | 338 | 18 | 8 | 68 | 2 | 23 | 4
